# Altium PCB Cross.PcbDoc
Units mm, origin at the board's own origin, x right, y up, seen from the top; angles counter-clockwise.
Board outline 131.06 x 43.05 mm, 2 copper layers (Top Layer, Bottom Layer); 11 components, 27 nets, 110 pads, 0 vias.
Unrouted connection lines stored in the file: 8.
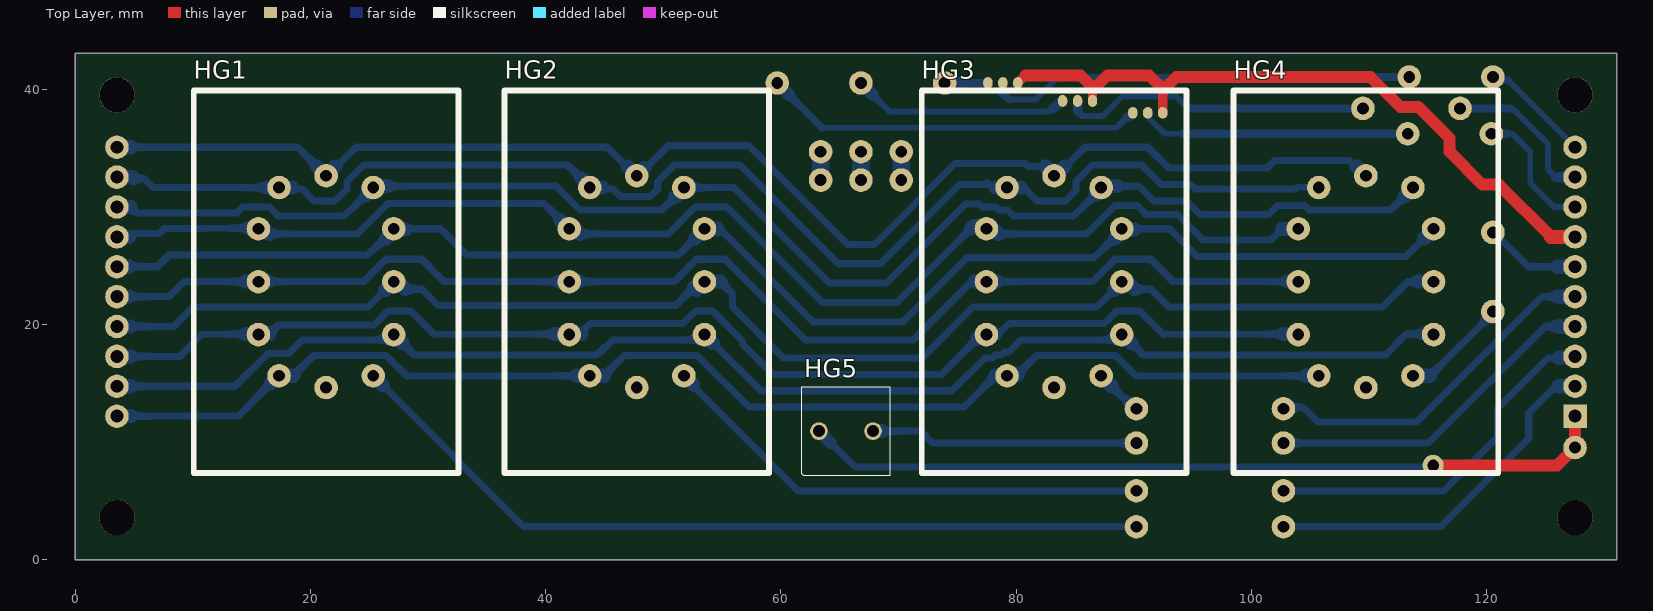
[diagram p0: Top Layer view]
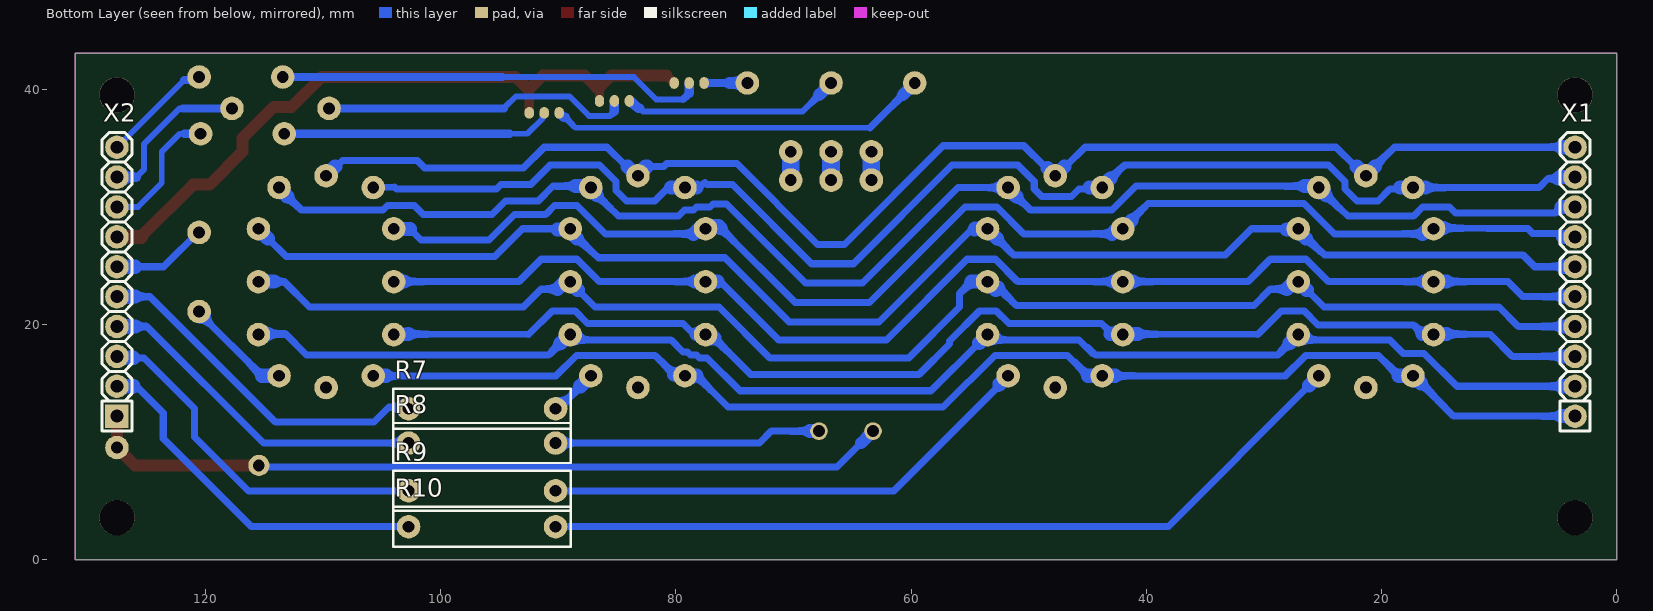
[diagram p1: Bottom Layer view, seen from below]
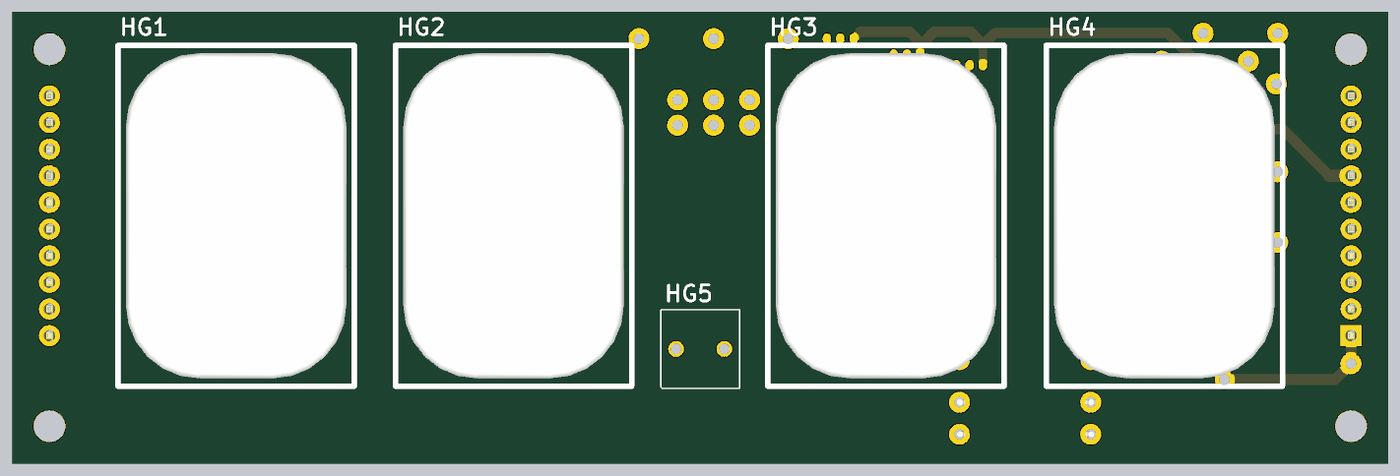
[diagram p2: 3D render of the assembled board from above, using the file's embedded part models]
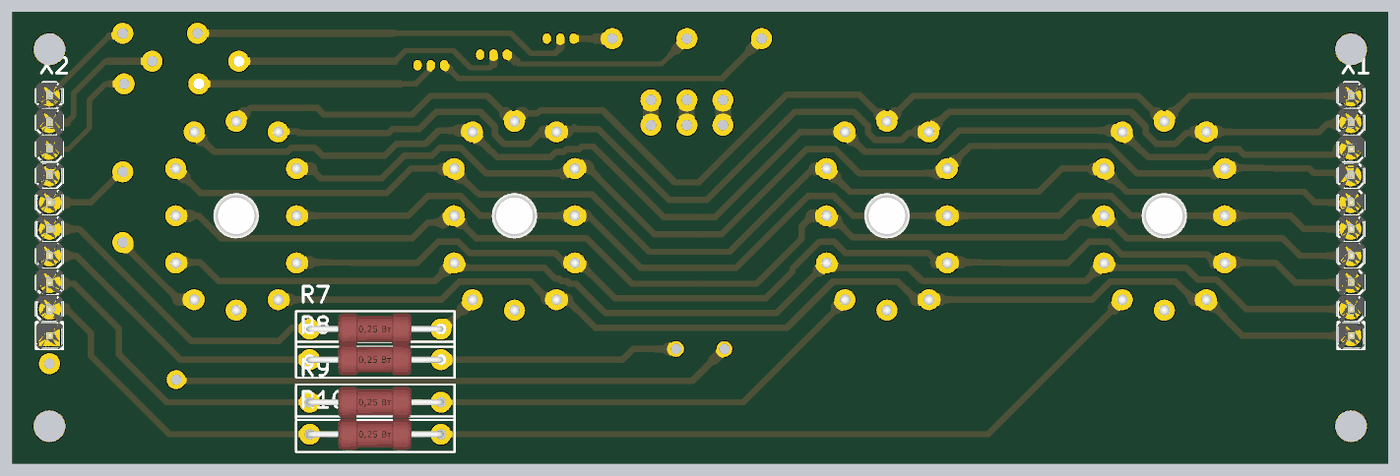
[diagram p3: 3D render of the assembled board from below, using the file's embedded part models]

## Layer stack, top to bottom
Top Solder: solder mask 0.0102, Solder Resist, Dk 3.5
Top Layer: signal copper 0.0356
Dielectric 1: dielectric 0.32, FR-4, Dk 4.8
Bottom Layer: signal copper 0.0356
Bottom Solder: solder mask 0.0102, Solder Resist, Dk 3.5

## Board outline
0,0 131.064,0 131.064,43.053 0,43.053

## Design rules (kind name [scope] priority, off if disabled: settings)
Clearance [All] p1: gap=0.254 ignorepadtopadclearanceinfootprint=FALSE except(0: Arc-Hole Track-Hole SMDPad-Hole THPad-Hole Via-Hole Fill-Hole Poly-Hole Region-Hole Text-Hole)
PolygonConnect [All] p1: connectstyle=Relief reliefconductorwidth=0.254 reliefentries=4 polygonreliefangle="90 Angle" airgapwidth=0.254
RoutingVias [All] p1: holewidth=0.711 width=1.27 viastyle="Through Hole" minholewidth=0.711 minwidth=1.27 maxholewidth=0.711 maxwidth=1.27
SolderMaskExpansion [All] p1: expansion=0.102
Width [All] p1 off: maxlimit=0.254 minlimit=0.254 preferedwidth=0.254
30 further rules are at their usual default settings.

## Components (designator, comment, footprint, x,y, rotation, side; value= is the part's Value field where it differs from the comment)
HG1 "Comment" PCBComponent_1 21.336,23.622 r180 top
HG2 "Comment" PCBComponent_1 47.752,23.622 r180 top
HG3 "Comment" PCBComponent_1 83.22,23.622 r180 top
HG4 "Comment" PCBComponent_1 109.728,23.622 r180 top
HG5 "ИНС-1" ИНС-1 65.532,10.922 r90 top
R7 "Comment" MLT 96.52,12.827 r0 bottom
R8 "Comment" MLT 96.52,9.906 r0 bottom
R9 "Comment" MLT 96.52,5.842 r0 bottom
R10 "Comment" MLT 96.52,2.794 r0 bottom
X1 "\"На К155ИД1\"" "CON: PLS-10"#1 3.556,23.622 r90 bottom
X2 "*" "CON: PLS-10"#2 127.508,23.622 r90 bottom

## Footprints (in the part's own frame and the unit in brackets; to place one, negate y for a bottom-side part, rotate by r counter-clockwise, add the part's x,y. Pads: shape width x height; smd on the part's side, far side on the other; paste and mask are expansions set on the pad)
"CON: PLS-10"#1 [mm] "PLS-40 10 pin header"
  round 2 hole 1.1: 1(-11.43,0) 2(-8.89,0) 3(-6.35,0) 4(-3.81,0) 5(-1.27,0) 6(1.27,0) 7(3.81,0) 8(6.35,0) 9(8.89,0) 10(11.43,0)
  silkscreen extent -12.7,-1.27 12.7,1.27, body extent -12.7,-1.27 12.7,1.27, height 8.54
"CON: PLS-10"#2 [mm] "PLS-40 10 pin header"
  rect 2x2 hole 1.1: 1(-11.43,0)
  round 2 hole 1.1: 2(-8.89,0) 3(-6.35,0) 4(-3.81,0) 5(-1.27,0) 6(1.27,0) 7(3.81,0) 8(6.35,0) 9(8.89,0) 10(11.43,0)
  silkscreen extent -12.7,-1.27 12.7,1.27, body extent -12.7,-1.27 12.7,1.27, height 8.54
MLT [mm]
  round 2 hole 1: 1(-6.3,0) 2(6.2,0)
  silkscreen extent -7.6,-1.7 7.5,1.7, body extent -6.55,-1.5 6.55,1.5, height 3.5
PCBComponent_1 [mm]
  round 2 hole 1: 75(0,9) 76(0,-9) 77(-4,8) 78(4,8) 79(4,-8) 80(-4,-8) 82(5.75,0) 83(5.75,4.5) 84(5.75,-4.5) 85(-5.75,4.5) 86(-5.75,-4.5)
  round 2 hole 1 mask+0.102: 81(-5.75,0)
  silkscreen extent -11.25,-16.25 11.25,16.25, body extent -10.5,-15.5 10.5,15.5, height 28
ИНС-1 [mm]
  round 1.5 hole 1: 93(0,2.3) 94(0,-2.3)
  silkscreen extent -3.75,-3.75 3.75,3.75, body extent -3.5,-3.5 3.5,3.5, height 24

## Part data
X1 X2: library part 10-Connector

## Free pads (board coordinates)
  round 3 hole 3: 2(3.556,3.556) 2(3.556,39.497) 2(127.508,3.556) 2(127.508,39.497)
  round 2 hole 1: 3(120.523,27.813) 4(120.523,21.082) 5(73.914,40.513) 6(70.231,34.671) 7(66.802,40.513) 8(66.802,34.671) 9(59.69,40.513) 10(63.373,34.671) 11(63.373,32.258) 12(66.802,32.258) 13(70.231,32.258) 15(127.508,9.525) 19(117.729,38.354) 19(120.396,36.195) 19(120.523,41.021) 20(109.474,38.354) 20(113.284,36.195) 20(113.411,41.021)
  round 1.8 hole 1: 15(115.443,8.001)
  oval 0.8x1 all layers, no hole: 16(77.597,40.513) 16(83.947,38.989) 16(89.916,37.973) 17(78.867,40.513) 17(85.217,38.989) 17(91.186,37.973) 18(80.137,40.513) 18(86.487,38.989) 18(92.456,37.973)

## Nets (pads, with @x,y where several pads share a name; then routed paths per layer and width w, separated by ;. In a path a pad name is that pad's centre, name@x,y a point inside that pad or via, vN(x,y) a via of type N, cw(c..) or ccw(c..) an arc to the next point about the centre after c; other vN are vias at no path point)
GND: HG5.93 pad.15 X2.1 | length 69
  Top Layer w1: pad.15@115.443,8.001 125.984,8.001 127.508,9.525 X2.1
  Bottom Layer w0.6: 64.262,9.906 66.294,7.874 pad.15@115.57,7.874
  Bottom Layer w1: HG5.93 64.248,9.906 64.262,9.906
L1: HG1.85 HG2.85 HG3.85 HG4.85 X1.2 | length 118.8
  Bottom Layer w0.254: HG2.85@53.447,19.177 HG2.85 ; HG4.85@115.423,19.177 HG4.85
  Bottom Layer w0.6: 4.699,14.732 13.589,14.732 16.383,17.526 18.161,17.526 19.304,18.669 HG1.85@26.289,18.669 ; HG1.85@26.974,19.1 HG1.85@26.996,18.868 ; 27.813,18.415 28.829,17.399 44.323,17.399 44.958,18.034 ; 44.577,17.526 45.72,18.669 HG2.85@52.705,18.669 ; 54.229,18.415 58.293,14.351 74.549,14.351 77.343,17.145 77.978,17.145 78.232,17.399 78.74,17.399 78.994,17.653 79.375,17.653 80.391,18.669 HG3.85@88.265,18.669 ; HG3.85@88.95,19.1 HG3.85@88.972,18.868 ; 89.789,18.415 90.805,17.399 111.379,17.399 113.157,19.177 HG4.85@114.681,19.177
  Bottom Layer w1.2: X1.2 4.699,14.732 ; HG1.85 27.793,18.415 27.813,18.415 ; HG2.85 HG2.85@54.209,18.415 ; HG3.85@89.062,19.122 89.769,18.415 89.789,18.415 ; HG4.85@114.681,19.177 HG4.85@115.423,19.177
L2: HG1.81 HG2.81 HG3.81 HG4.81 X1.4 | length 121.8
  Bottom Layer w0.254: 26.035,22.606 26.352,22.924 ; HG1.81 HG1.81@27.432,23.622 ; 88.011,22.606 HG3.81@88.328,22.924 ; HG3.81@89.062,23.622 HG3.81@89.408,23.622
  Bottom Layer w0.6: 4.699,19.812 8.382,19.812 10.033,21.463 24.892,21.463 26.035,22.606 ; 28.067,22.987 29.464,22.987 30.861,21.59 51.054,21.59 52.596,23.132 ; 54.864,23.622 55.88,22.606 55.88,21.463 60.198,17.145 72.009,17.145 76.327,21.463 86.868,21.463 88.011,22.606 ; 90.043,22.987 91.44,22.987 92.964,21.463 111.125,21.463 113.284,23.622 114.173,23.622
  Bottom Layer w1.2: X1.4 4.699,19.812 ; 26.352,22.924 26.388,22.924 HG1.81 ; HG1.81@27.432,23.622 28.067,22.987 ; 52.596,23.132 HG2.81@52.804,22.924 ; HG2.81@53.848,23.622 54.864,23.622 ; HG3.81@88.328,22.924 88.364,22.924 HG3.81@89.062,23.622 ; HG3.81@89.408,23.622 90.043,22.987 ; 114.173,23.622 HG4.81
L3: HG1.86 HG2.86 HG3.86 HG4.86 X1.6 | length 123.5
  Bottom Layer w0.6: 4.572,24.892 6.985,24.892 8.001,25.908 24.872,25.908 26.416,27.305 ; HG1.86@28.067,28.067 28.122,28.122 31.06,28.122 33.274,25.908 51.288,25.908 52.705,27.305 ; 54.61,28.067 54.864,28.067 62.738,20.193 70.358,20.193 75.819,25.654 86.567,25.654 88.392,27.305 ; 90.043,28.067 90.098,28.122 93.036,28.122 95.377,25.781 113.135,25.781 114.681,27.305
  Bottom Layer w1.2: X1.6 4.572,24.892 ; 26.416,27.305 27.178,28.067 HG1.86@28.067,28.067 ; 52.705,27.305 HG2.86 54.555,28.122 54.61,28.067 ; 88.392,27.305 89.154,28.067 90.043,28.067 ; 114.681,27.305 HG4.86
L4: HG1.80 HG2.80 HG3.80 HG4.80 X1.8 | length 123.4
  Bottom Layer w0.6: 4.699,29.972 5.207,29.464 13.717,29.464 14.225,29.972 16.51,29.972 17.272,29.21 22.877,29.21 HG1.80@24.765,30.988 ; 26.543,31.75 40.894,31.75 42.926,29.718 49.848,29.718 51.054,30.861 ; HG2.80 56.008,31.622 64.135,23.495 68.961,23.495 75.692,30.226 76.835,30.226 77.089,29.972 78.232,29.972 78.486,29.718 79.248,29.718 79.756,29.21 84.853,29.21 HG3.80@86.741,30.988 ; 88.519,31.75 90.424,31.75 91.694,30.48 94.488,30.48 95.631,29.337 101.473,29.337 102.235,30.099 104.521,30.099 104.902,29.718 111.824,29.718 113.03,30.861
  Bottom Layer w1.2: X1.8 4.699,29.972 ; HG1.80@24.765,30.988 25.527,31.75 26.543,31.75 ; 51.054,30.861 HG2.80 ; HG3.80@86.741,30.988 87.503,31.75 88.519,31.75 ; 113.03,30.861 HG4.80
L5: HG1.76 HG2.76 HG3.76 HG4.76 X1.10 | length 120.1
  Bottom Layer w0.6: 4.699,35.052 18.906,35.052 20.574,33.401 ; 22.225,33.401 23.876,35.052 45.212,35.052 46.863,33.401 ; 48.514,33.274 50.419,35.179 57.277,35.179 65.659,26.797 67.945,26.797 74.803,33.655 80.772,33.655 81.026,33.401 82.44,33.401 ; 82.442,33.4 82.55,33.401 ; 84.201,33.401 85.852,35.052 91.186,35.052 92.964,33.274 101.346,33.274 101.981,33.909 108.331,33.909 108.839,33.401
  Bottom Layer w1.2: X1.10 4.699,35.052 ; 20.574,33.401 HG1.76 22.115,33.401 ; 46.973,33.401 HG2.76 HG2.76@48.404,33.274 ; 82.442,33.4 HG3.76 ; 82.55,33.401 83.267,32.668 83.312,32.622 84.091,33.401 ; 108.949,33.401 HG4.76
L6: HG1.79 HG2.79 HG3.79 HG4.79 X1.9 | length 116.3
  Bottom Layer w0.254: 77.979,31.622 HG3.79@78.232,31.622
  Bottom Layer w0.6: 4.953,32.385 5.842,32.385 6.605,31.622 16.256,31.623 ; 18.542,31.496 19.304,31.496 20.32,30.48 22.098,30.48 23.114,31.496 23.114,32.131 24.511,33.528 41.846,33.528 43.053,32.385 ; 44.958,31.496 45.72,31.496 46.355,30.861 48.895,30.861 49.53,31.496 49.53,32.131 50.927,33.528 56.515,33.528 64.897,25.146 68.453,25.146 75.184,31.877 77.343,31.877 77.533,32.067 77.979,31.622 ; 80.518,31.496 80.772,31.496 81.788,30.48 84.201,30.48 85.09,31.369 85.09,32.131 86.487,33.528 90.678,33.528 92.329,31.877 94.869,31.877 95.25,31.496 103.747,31.496 103.923,31.671 HG4.79
  Bottom Layer w1.2: X1.9 4.826,32.512 4.953,32.385 ; 16.256,31.623 HG1.79 18.416,31.622 ; 43.053,32.385 HG2.79 44.832,31.622 ; HG3.79@78.232,31.622 HG3.79 79.312,31.622 80.392,31.622
L7: HG1.84 HG2.84 HG3.84 HG4.84 X1.7 | length 112.7
  Bottom Layer w0.254: HG3.84@77.225,28.367 HG3.84
  Bottom Layer w0.6: 4.572,27.432 4.872,27.732 7.158,27.732 7.548,28.122 HG1.84@14.732,28.194 ; 16.51,27.686 24.003,27.686 26.589,30.272 39.851,30.272 41.275,28.829 ; 42.926,27.686 50.419,27.686 52.705,29.972 55.417,29.972 63.545,21.844 69.85,21.844 76.2,28.194 ; 78.486,27.686 85.979,27.686 88.392,30.099 90.297,30.099 91.059,29.337 93.726,29.337 95.885,27.178 101.656,27.178 102.58,28.103
  Bottom Layer w1.2: X1.7 4.572,27.432 ; HG1.84@14.732,28.194 HG1.84 15.83,28.366 16.51,27.686 ; 41.275,28.829 HG2.84 ; HG2.84@42.49,28.122 42.926,27.686 ; 76.2,28.194 76.373,28.367 HG3.84@77.225,28.367 ; HG3.84@77.471,28.13 77.998,28.174 78.486,27.686 ; 102.58,28.103 HG4.84
L8: HG1.82 HG2.82 HG3.82 HG4.82 X1.5 | length 109.8
  Bottom Layer w0.6: 4.572,22.352 8.001,22.352 9.271,23.622 14.478,23.622 ; HG1.82@16.383,23.622 24.511,23.622 26.416,25.527 29.464,25.527 31.369,23.622 HG2.82@41.148,23.622 ; HG2.82@42.799,23.622 50.927,23.622 52.832,25.527 55.245,25.527 62.103,18.669 71.247,18.669 76.2,23.622 76.454,23.622 ; HG3.82@78.359,23.622 86.487,23.622 88.392,25.527 91.44,25.527 93.345,23.622 HG4.82@103.124,23.622
  Bottom Layer w1.2: X1.5 4.572,22.352 ; 14.478,23.622 HG1.82 HG1.82@16.383,23.622 ; HG2.82@41.148,23.622 HG2.82 HG2.82@42.799,23.622 ; 76.454,23.622 HG3.82 HG3.82@78.359,23.622 ; HG4.82@103.124,23.622 HG4.82
L9: HG1.83 HG2.83 HG3.83 HG4.83 X1.3 | length 109.5
  Bottom Layer w0.254: 43.053,19.174 43.437,19.558
  Bottom Layer w0.6: 4.699,17.272 8.89,17.272 10.74,19.122 14.478,19.177 ; HG1.83@16.51,19.177 17.272,19.939 25.4,19.939 26.607,21.145 28.511,21.145 30.535,19.122 40.767,19.174 ; HG2.83@42.926,19.177 43.815,20.066 51.689,20.066 52.768,21.145 54.165,21.145 56.741,18.57 56.741,18.316 59.309,15.748 73.66,15.748 HG3.83@76.736,18.824 ; 78.486,19.177 79.375,20.066 87.503,20.066 88.582,21.145 90.487,21.145 92.511,19.122 102.743,19.174
  Bottom Layer w1.2: X1.3 4.699,17.272 ; 14.478,19.177 HG1.83@16.51,19.177 ; 40.767,19.174 43.053,19.174 ; HG3.83@76.736,18.824 77.034,19.122 HG3.83 HG3.83@78.231,19.183 ; 102.743,19.174 HG4.83
L10: HG1.78 HG2.78 HG3.78 HG4.78 X1.1 | length 110.1
  Bottom Layer w0.6: 4.699,12.192 13.906,12.192 HG1.78@16.637,14.986 ; 18.543,15.622 20.282,17.361 26.454,17.361 28.194,15.621 42.672,15.621 ; 44.959,15.622 46.698,17.361 52.87,17.361 57.277,12.954 75.565,12.954 HG3.78@78.233,15.622 ; HG3.78@80.137,15.748 81.75,17.361 88.43,17.361 90.17,15.621 104.648,15.621
  Bottom Layer w1.2: X1.1 4.699,12.192 ; HG1.78@16.637,14.986 HG1.78 18.543,15.622 ; 42.672,15.621 42.673,15.622 HG2.78 44.959,15.622 ; HG3.78@78.233,15.622 HG3.78 ; HG3.78@79.262,15.576 79.433,15.748 HG3.78@80.137,15.748 ; 104.648,15.621 104.649,15.622 HG4.78
NetHG1_11: HG1.77 R10.1 R10.2 X2.2 | length 101.2
  Bottom Layer w0.6: 26.162,14.796 38.132,2.826 ; 38.1,2.794 R10.1 ; R10.2 116.078,2.794 123.571,10.287 123.571,12.446 125.857,14.732 126.111,14.732
  Bottom Layer w1.2: HG1.77 26.162,14.796 ; 126.111,14.732 X2.2
NetHG2_11: HG2.77 R9.1 R9.2 X2.3 | length 73.5
  Bottom Layer w0.254: X2.3@127.421,17.185 X2.3
  Bottom Layer w0.6: 52.578,14.732 61.468,5.842 R9.1 ; R9.2 116.332,5.842 120.904,10.414 120.904,12.827 125.222,17.145 126.111,17.145
  Bottom Layer w1: 52.578,14.732 52.578,14.986
  Bottom Layer w1.2: HG2.77 52.483,14.891 ; 126.111,17.145 126.151,17.185 X2.3@127.421,17.185
NetHG3_11: HG3.77 R7.1 R7.2 X2.5 | length 33.4
  Bottom Layer w0.6: 88.138,14.732 89.535,13.335 R7.1@90.297,13.335 ; R7.2@103.051,12.954 104.394,12.954 105.664,11.684 114.046,11.684 124.714,22.352 125.984,22.352
  Bottom Layer w1.2: HG3.77 88.11,14.732 88.138,14.732 ; 125.984,22.352 X2.5
NetHG4_11: HG4.77 pad.3 pad.4 X2.6 | length 17.2
  Bottom Layer w0.6: 115.19,15.622 pad.4@120.492,20.923 ; pad.3@120.492,27.94 123.54,24.892 125.984,24.892
  Bottom Layer w1.2: HG4.77 115.19,15.622 ; 125.984,24.892 X2.6
NetHG5_2: HG5.94 R8.1 R8.2 X2.4 | length 51.7
  Bottom Layer w0.6: HG5.94@68.58,10.922 71.882,10.922 72.898,9.906 R8.1 ; R8.2 115.062,9.906 124.968,19.812 125.984,19.812
  Bottom Layer w1.2: HG5.94 HG5.94@68.58,10.922 ; 125.984,19.812 X2.4
NetR1_1: 
NetR1_2: 
NetR2_1: pad.9 pad.16@89.916,37.973 | length 32.3
  Bottom Layer w0.5: 63.5,36.703 88.519,36.703 89.408,37.592
  Bottom Layer w0.6: 60.706,39.497 63.5,36.703
  Bottom Layer w0.8: 89.408,37.592 89.535,37.592 pad.16@89.916,37.973
  Bottom Layer w1: pad.9 60.706,39.497
NetR2_2: pad.17@91.186,37.973 pad.19@120.396,36.195 pad.20@113.284,36.195 X2.8 | length 33.9
  Bottom Layer w0.5: pad.17@91.186,37.973 91.317,37.842 91.317,37.501 92.623,36.195 93.726,36.195 ; 121.793,36.195 122.174,36.195 123.698,34.671 123.698,32.004 125.73,29.972 X2.8
  Bottom Layer w0.7: 94.107,36.195 pad.20@113.284,36.195 ; pad.19@120.396,36.195 121.793,36.195
NetR3_1: pad.7 pad.16@83.947,38.989 | length 18.5
  Bottom Layer w0.254: pad.16@83.82,38.989 pad.16@83.947,38.989
  Bottom Layer w0.5: 67.818,39.497 69.215,38.1 82.804,38.1 83.058,38.354
  Bottom Layer w0.8: 83.058,38.354 83.185,38.354 pad.16@83.82,38.989
  Bottom Layer w1: pad.7 67.818,39.497
NetR3_2: pad.17@85.217,38.989 pad.19@117.729,38.354 pad.20@109.474,38.354 X2.9 | length 39.6
  Bottom Layer w0.5: 85.217,38.1 85.598,37.719 87.376,37.719 89.027,39.37 93.599,39.37 94.615,38.354 ; 122.174,38.354 125.222,35.306 125.222,33.147 125.857,32.512
  Bottom Layer w0.7: 94.615,38.354 pad.20@109.474,38.354 ; pad.19@117.729,38.354 121.92,38.354
  Bottom Layer w0.8: 85.217,38.1 pad.17@85.217,38.989 ; 125.857,32.512 X2.9
NetR4_1: pad.5 pad.16@77.597,40.513 | length 3.7
  Bottom Layer w0.6: 75.438,40.513 pad.16@77.597,40.513
  Bottom Layer w1: pad.5 75.438,40.513
NetR4_2: pad.17@78.867,40.513 pad.19@120.523,41.021 pad.20@113.411,41.021 X2.10 | length 45.8
  Bottom Layer w0.5: 79.375,39.116 81.661,39.116 83.566,41.021 94.742,41.021 ; 121.793,40.767 X2.10
  Bottom Layer w0.6: 78.867,39.624 79.375,39.116
  Bottom Layer w0.7: 94.742,41.021 pad.20@113.411,41.021 ; pad.19@120.523,40.767 121.793,40.767
  Bottom Layer w0.8: 78.867,39.624 pad.17@78.867,40.513
NetR5_2: 
NetR6_2: 
VCC: pad.18 X2.7 | length 58.8
  Top Layer w0.254: 86.487,40.132 86.741,40.132 ; 92.456,40.005 92.583,40.005
  Top Layer w0.8: pad.18@80.137,40.513 80.772,41.148 ; pad.18@86.487,38.989 86.487,40.132 ; pad.18@92.456,37.973 92.456,40.005
  Top Layer w1: 80.772,41.148 85.471,41.148 86.487,40.132 ; 86.741,40.132 87.757,41.148 91.313,41.148 92.456,40.005 ; 92.583,40.005 93.599,41.021 110.109,41.021 112.649,38.481 114.173,38.481 116.84,35.814 116.84,34.671 119.634,31.877 121.031,31.877 125.476,27.432
  Top Layer w1.2: 125.476,27.432 X2.7
pads on no net: HG1.75 HG2.75 HG3.75 HG4.75
copper on no net: | length 7.2
  Bottom Layer w1.5: 63.373,32.258 63.373,34.671 ; 66.802,32.258 66.802,34.671 ; 70.231,32.258 70.231,34.671

## Keep-outs
Keep-Out Layer:
  the board outline again, w0.1